# Altium PCB Power.PcbDoc
Units mil, origin at the board's own origin, x right, y up, seen from the top; angles counter-clockwise.
Board outline 1220.47 x 1511.81 mil, 2 copper layers (Top Layer, Bottom Layer), stack 21 mil thick; 38 components, 34 nets, 171 pads, 196 vias.
Unrouted connection lines stored in the file: 38.
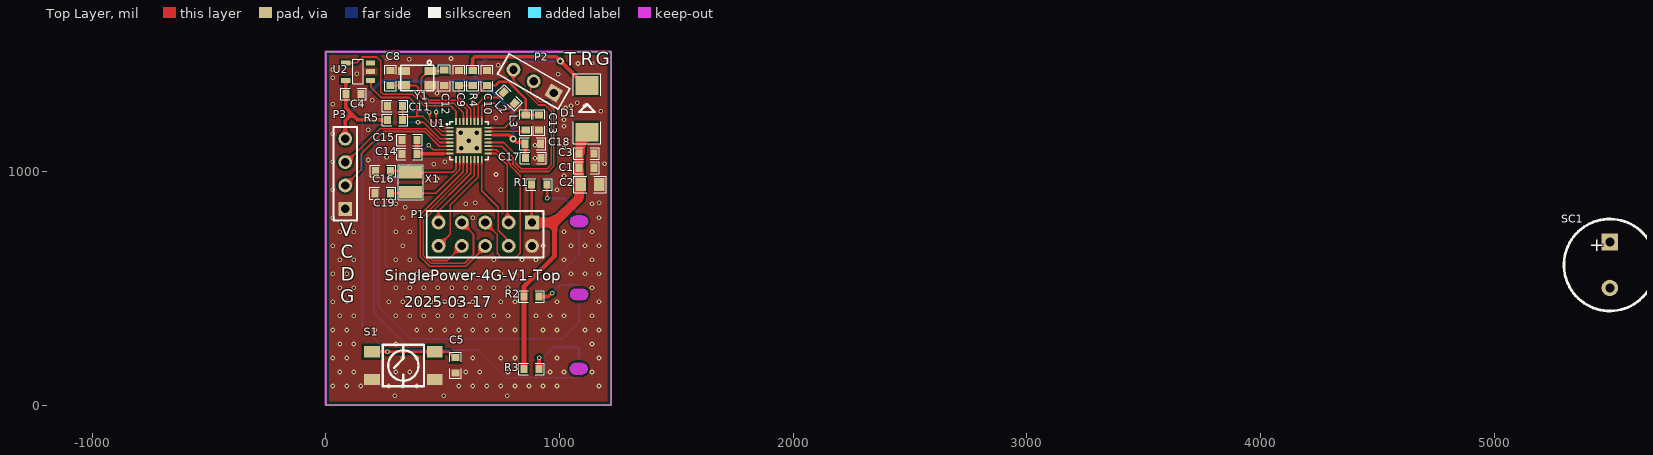
[diagram p0: Top Layer view]
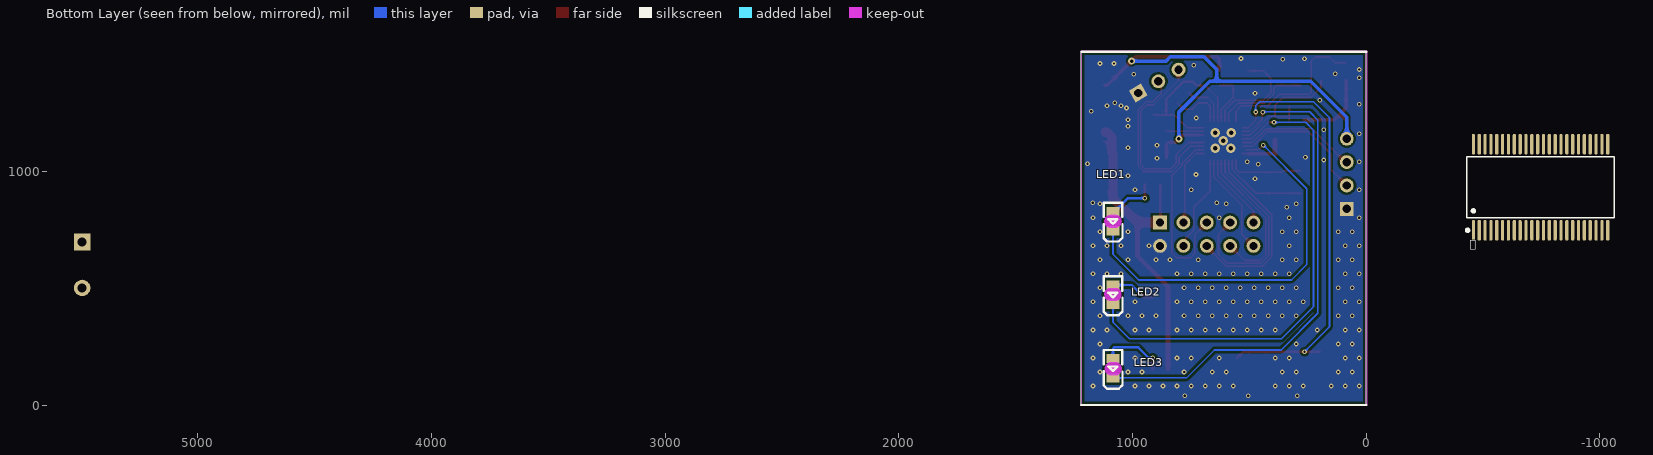
[diagram p1: Bottom Layer view, seen from below]

## Layer stack, top to bottom
Top Solder: solder mask 0.4, Solder Resist, Dk 3.5
Top Layer: signal copper 1.4
Dielectric 2: prepreg 2.8, Composite dielectric, Dk 4.1
Dielectric 1: prepreg 12.6, Composite dielectric, Dk 4.1
Dielectric 3: prepreg 2.8, Composite dielectric, Dk 4.1
Bottom Layer: signal copper 1.4
Bottom Solder: solder mask 0.4, Solder Resist, Dk 3.5

## Board outline
0,0 0,1511.81 1220.47,1511.81 1220.47,0
cut-out: 1070.22,130.42 cw(c1070.22,155.44) 1070.22,180.45 1093.85,180.45 cw(c1093.85,155.44) 1118.87,155.44 cw(c1093.85,155.44) 1093.85,130.42
cut-out: 1072.09,448.6 cw(c1072.09,473.62) 1072.09,498.63 1095.72,498.63 cw(c1095.72,473.62) 1120.74,473.62 cw(c1095.72,473.62) 1095.72,448.6
cut-out: 1071.88,761.52 cw(c1071.88,786.53) 1071.88,811.55 1095.52,811.55 cw(c1095.52,786.53) 1120.53,786.53 cw(c1095.52,786.53) 1095.52,761.52

## Design rules (kind name [scope] priority, off if disabled: settings)
Clearance "Via to pad" [IsVia vs IsPad] p1: gap=10 ignorepadtopadclearanceinfootprint=FALSE
Clearance Ploy [InPoly] p2: gap=10 ignorepadtopadclearanceinfootprint=FALSE
Clearance "Track to pad" [IsTrack vs IsPad] p3: gap=8 ignorepadtopadclearanceinfootprint=FALSE
Clearance "Track to track" [IsTrack vs IsTrack] p4: gap=5 ignorepadtopadclearanceinfootprint=FALSE
Clearance "Via to Track" [IsVia vs IsTrack] p5: gap=10 ignorepadtopadclearanceinfootprint=FALSE
Clearance "Via To Via" [IsVia vs IsVia] p6: gap=10 ignorepadtopadclearanceinfootprint=FALSE
ComponentClearance [All] p1: gap=0 collisioncheckmode=3 verticalgap=0 showdistances=FALSE
DiffPairsRouting [All] p1: maxlimit=10 minlimit=7 mostfreqgap=7 toplayer_minwidth=5 toplayer_maxwidth=100 toplayer_prefwidth=7 bottomlayer_minwidth=5 bottomlayer_maxwidth=100 bottomlayer_prefwidth=7 maxuncoupledlength=500
HoleSize [All] p1: absolutevalues=TRUE maxlimit=200 minlimit=1 maxpercent=80.000 minpercent=20.000
HoleToHoleClearance [All] p1: gap=5 allowstackedmicrovias=TRUE
MinimumSolderMaskSliver [All] p1: minsoldermaskwidth=0
PolygonConnect [All vs (InPadClass('All Pads'))] p1: connectstyle=Direct reliefconductorwidth=10 reliefentries=4 polygonreliefangle="90 Angle" airgapwidth=10
PolygonConnect GND焊盘 [InNet('GND_1') vs (InPadClass('All Pads'))] p2: connectstyle=Relief reliefconductorwidth=10 reliefentries=4 polygonreliefangle="90 Angle" airgapwidth=10
PolygonConnect GND过孔 [All vs IsVia] p3: connectstyle=Direct reliefconductorwidth=10 reliefentries=4 polygonreliefangle="90 Angle" airgapwidth=10
RoutingVias RoutingVias_1 [InNet('AGND_1')] p1: holewidth=10 width=20 viastyle="Through Hole" minholewidth=10 minwidth=20 maxholewidth=28 maxwidth=50
RoutingVias [All] p2: holewidth=10 width=20 viastyle="Through Hole" minholewidth=10 minwidth=20 maxholewidth=28 maxwidth=50
SilkToSilkClearance [All] p1: silktosilkclearance=0
SilkToSolderMaskClearance [IsPad] p1: minsilkscreentomaskgap=0 clearancetoexposedcopper=TRUE
SolderMaskExpansion [All] p1: expansion=1 istentingtop=FALSE
Width [All] p1: maxlimit=300 minlimit=5 preferedwidth=7 minimp=50.000000 maximp=50.000000 favimp=50.000000
23 further rules are at their usual default settings.

## Classes and differential pairs
component class MCU: C4 C5 C8 C9 C10 C11 C12 C13 C14 C15 C16 C17 C18 C19 L2 L3 LED1 LED2 LED3 P2 P3 R1 R2 R3 R4 R5 S1 U1 U2 X1 Y1
component class 连接: C1 C2 C3 D1 P1

## Components (designator, comment, footprint, x,y, rotation, side; value= is the part's Value field where it differs from the comment)
 "HT1621_C512789" SSOP48 -746.5,932.19 r180 bottom (schematic designator U7)
C1 "10uF/25V" 0603R 1148.31,1015.51 r180 top
C2 "47uF/10V" 0805R 1090.81,944 r0 top
C3 "104/10V" 0603R 1148.31,1076.6 r180 top
C4 "104" 0603R 150.99,1331.2 r180 top
C5 "104" 0603R 554.4,202.62 r270 top
C8 "12pF" 0603r 277.11,1432.82 r270 top
C9 "1uF/10V" 0603R 569.33,1432.82 r270 top
C10 "1uF/10V" 0603R 689.97,1432.82 r270 top
C11 "1uF/10V" 0603R 263.93,1280.48 r0 top
C12 "12pF" 0603r 506.95,1368.03 r90 top
C13 "1uF/10V" 0603R 912.97,1176.82 r90 top
C14 "2.2uF/10V" 0603R 324.96,1073.99 r0 top
C15 "104/10V" 0603R 324.96,1135.01 r0 top
C16 "10pF" 0603r 277.45,1002.12 r180 top
C17 "104/10V" 0603R 919.9,1057.45 r180 top
C18 "10uF/10V" 0603R 918.34,1118.1 r180 top
C19 "10pF" 0603r 211.11,906.72 r0 top
D1 "SS34" DO-214AC 1117.81,1368.03 r90 top
L2 "1.3nH" 0603R 761.57,1338.34 r315 top
L3 "4.7uH" 0603R 855.85,1176.44 r90 top
LED1 "LED" LED0805 1083.7,787.4 r90 bottom
LED2 "LED" LED0805 1083.7,472.44 r90 bottom
LED3 "LED" LED0805 1083.7,157.48 r90 bottom
P1 "Header 5X2" HDR2X5 882.2,781.18 r180 top locked
P2 "Header 3" HDR1X3 976,1335.62 r150 top
P3 "Header 4" HDR1X4 82.95,839.74 r90 top
R1 "Res2" 0603R 880.85,944 r0 top value=1K
R2 "Res2" 0603R 847.97,464.57 r0 top value=1K
R3 "Res2" 0603R 847.97,154.88 r0 top value=1K
R4 "0R/5%" 0603R 628.95,1432.82 r270 top
R5 "10K/5%" 0603R 263.93,1220.31 r0 top
S1 "SW2" 4.5*4.5贴片4脚独立按键 331.59,169.16 r180 top
SC1 "10F/2.7V" "5F 2.7V  10*20 脚尖距5mm" 5495.77,599.58 r270 top
U1 "N32WB031KEQ6-2" "QFN32 4X4" 612.29,1131.88 r0 top
U2 "CAT823ZTDI-GT3" SOT-23-5 191.07,1389.76 r90 top
X1 "32.768K/7pF" Y3215 362.96,953.48 r90 top
Y1 "32MHZ/8PF" 3225 391.52,1399.74 r0 top

## Footprints (in the part's own frame and the unit in brackets; to place one, negate y for a bottom-side part, rotate by r counter-clockwise, add the part's x,y. Pads: shape width x height; smd on the part's side, far side on the other; paste and mask are expansions set on the pad)
4.5*4.5贴片4脚独立按键 [mm]
  rect 1.7x1.2 smd: 1(-3.4,-1.5) 1(3.4,-1.5) 2(-3.4,1.5) 2(3.4,1.5)
  silkscreen extent -2.25,-2.25 2.25,2.25
"5F 2.7V  10*20 脚尖距5mm" [mm]
  rect 1.8x1.8 hole 1: 1(-2.5,0)
  round 1.8 hole 1: 2(2.5,0)
  silkscreen extent -5,-5 5,5
0603R [mil]
  rect 30x35 smd: 1(0,0) 2(65,0)
  silkscreen extent -23,-25 88,25
0603r [mil]
  rect 30x35 smd: 1(0,0) 2(65,0)
  silkscreen extent -23,-25 88,25
0805R [mil]
  rect 45x55 smd: 1(0,0) 2(80,0)
  silkscreen extent -30,-35 110,35
3225 [mm]
  rect 1.3x0.9 smd: 1(1.425,0.775) 2(-1.425,0.775) 3(-1.425,-0.775) 4(1.425,-0.775)
  silkscreen extent -1.78,-1.4 1.78,1.91, body extent -1.65,-1.3 1.55,1.2, height 0.61
DO-214AC [mil]
  rect 80x98.43 smd: 1(0,0) 2(-200,0)
  silkscreen extent -250,-59 50,59
HDR1X3 [mm] "Connector; Header; 3 Position"
  rect 1.5x1.5 hole 0.9: 1(0,0)
  round 1.5 hole 0.9: 2(2.54,0) 3(5.08,0)
  silkscreen extent -1.27,-1.27 6.35,1.27
HDR1X4 [mm] "Connector; Header; 4 Position"
  rect 1.5x1.5 hole 0.9: 1(0,0)
  round 1.5 hole 0.9: 2(2.54,0) 3(5.08,0) 4(7.62,0)
  silkscreen extent -1.27,-1.27 8.89,1.27
HDR2X5 [mm] "Connector; Header; 5x2 Position"
  rect 1.5x1.5 hole 0.9: 1(0,0)
  round 1.5 hole 0.9: 2(0,2.54) 3(2.54,0) 4(2.54,2.54) 5(5.08,0) 6(5.08,2.54) 7(7.62,0) 8(7.62,2.54) 9(10.16,0) 10(10.16,2.54)
  silkscreen extent -1.27,-1.27 11.43,3.81
LED0805 [mm]
  rect 1x1.4 smd: 1(1.05,0) 2(-1.05,0)
  silkscreen extent -2.22,-1.04 1.99,1.01
"QFN32 4X4" [mm]
  rect 0.76x0.2 smd paste-100 mask+0.051: 1(-2.08,1.4) 2(-2.08,1) 3(-2.08,0.6) 4(-2.08,0.2) 5(-2.08,-0.2) 6(-2.08,-0.6) 7(-2.08,-1) 8(-2.08,-1.4) 17(2.08,-1.4) 18(2.08,-1) 19(2.08,-0.6) 20(2.08,-0.2) 21(2.08,0.2) 22(2.08,0.6) 23(2.08,1) 24(2.08,1.4)
  rect 0.2x0.76 smd paste-100 mask+0.051: 9(-1.4,-2.08) 10(-1,-2.08) 11(-0.6,-2.08) 12(-0.2,-2.08) 13(0.2,-2.08) 14(0.6,-2.08) 15(1,-2.08) 16(1.4,-2.08) 25(1.4,2.08) 26(1,2.08) 27(0.6,2.08) 28(0.2,2.08) 29(-0.2,2.08) 30(-0.6,2.08) 31(-1,2.08) 32(-1.4,2.08)
  rect 2.7x2.7 smd paste-100 mask+0.051: 33(0,0)
  silkscreen extent -2.46,-2.08 2.08,2.08
SOT-23-5 [mm]
  rect 0.55x1 smd: 1(0,0) 2(0.95,0) 3(1.9,0) 4(1.9,2.7) 5(0,2.7)
  silkscreen extent -0.37,0.76 2.29,1.91
SSOP48 [mil]
  oval 14x89.24 smd: 1(-287.5,-184.19) 2(-262.5,-184.19) 3(-237.5,-184.19) 4(-212.5,-184.19) 5(-187.5,-184.19) 6(-162.5,-184.19) 7(-137.5,-184.19) 8(-112.5,-184.19) 9(-87.5,-184.19) 10(-62.5,-184.19) 11(-37.5,-184.19) 12(-12.5,-184.19) 13(12.5,-184.19) 14(37.5,-184.19) 15(62.5,-184.19) 16(87.5,-184.19) 17(112.5,-184.19) 18(137.5,-184.19) 19(162.5,-184.19) 20(187.5,-184.19) 21(212.5,-184.19) 22(237.5,-184.19) 23(262.5,-184.19) 24(287.5,-184.19) 25(287.5,184.19) 26(262.5,184.19) 27(237.5,184.19) 28(212.5,184.19) 29(187.5,184.19) 30(162.5,184.19) 31(137.5,184.19) 32(112.5,184.19) 33(87.5,184.19) 34(62.5,184.19) 35(37.5,184.19) 36(12.5,184.19) 37(-12.5,184.19) 38(-37.5,184.19) 39(-62.5,184.19) 40(-87.5,184.19) 41(-112.5,184.19) 42(-137.5,184.19) 43(-162.5,184.19) 44(-187.5,184.19) 45(-212.5,184.19) 46(-237.5,184.19) 47(-262.5,184.19) 48(-287.5,184.19)
  silkscreen extent -318,-190 316,131
Y3215 [mm]
  rect 1.35x2.5 smd: 1(-1.075,0) 2(1.075,0)
  silkscreen extent -1.9,-1.35 1.9,1.37

## Part data
: JLCPCB Part Class="Extended Part", LCSC Part Name=HT1621, Manufacturer=HGSEMI(华冠), Add into BOM=yes, Convert to PCB=yes, Datasheet=https://atta.szlcsc.com/upload/public/pdf/source/20210713/C512789_EAEA0A466E7F817181A87DC85DF4172E.pdf, Device=HT1621_C512789, Manufacturer Part=HT1621, Name=HT1621, Supplier=LCSC, Supplier Footprint=SSOP-48-300mil, Supplier Part=C512789, Symbol=HT1621
C1 C4 C5 C8 C12 C16 C19: library part CAP
C2: library part "Cap Pol1", "Polarized Capacitor (Radial)", LatestRevisionDate=17-Jul-2002, LatestRevisionNote="Re-released for DXP Platform.", PackageDescription="Polarized Capacitor (Radial); 2 Leads", PackageReference=RB7.6-15, Published=8-Jun-2000, Publisher="Altium Limited"
C3 C9 C10 C11 C13 C14 C15 C17 C18: library part CAP_1
D1: library part DIODE
L2 L3: library part Inductor, "Inductor", Code_IEC=1005, Code_JEITA=0402, LatestRevisionDate=29-May-2009, LatestRevisionNote="IPC-7351 Footprint Added.", PackageDescription="Chip Inductor", PackageReference=0402-A, Published=8-Jun-2000, Publisher="Altium Limited"
P1: "Header, 5-Pin, Dual row", LatestRevisionDate=17-Jul-2002, LatestRevisionNote="Re-released for DXP Platform.", Publisher="Altium Limited"
P2: "Header, 3-Pin", LatestRevisionDate=17-Jul-2002, LatestRevisionNote="Re-released for DXP Platform.", Publisher="Altium Limited"
P3: "Header, 4-Pin", LatestRevisionDate=17-Jul-2002, LatestRevisionNote="Re-released for DXP Platform.", Publisher="Altium Limited"
R4 R5: library part RES
SC1: library part CAP+
U1: JLCPCB Part Class="Extended Part", Manufacturer=Nations(国民技术), Add into BOM=yes, Convert to PCB=yes, Device=N32WB031KEQ6-2, LCSC Part Name=N32WB031KEQ6-2, Manufacturer Part=N32WB031KEQ6-2, Supplier=LCSC, Supplier Footprint=QFN-32, Supplier Part=C2981446, Symbol=N32WB031KEQ6-2
U2: library part CAT823
X1: library part XTAL
Y1: library part 12MHz无源
R1 R2 R3: LatestRevisionDate=17-Jul-2002, LatestRevisionNote="Re-released for DXP Platform.", PackageDescription="Axial Device, Thru-Hole; 2 Leads; 0.4 in Pin Spacing", PackageReference=AXIAL-0.4, Published=8-Jun-2000, Publisher="Altium Limited"

## Via types
v1: diameter 20, hole 10, Top Layer to Bottom Layer, 189 vias
v2: diameter 40, hole 20, Top Layer to Bottom Layer, 5 vias
v3: diameter 30, hole 15, Top Layer to Bottom Layer, 2 vias

## Nets (pads, with @x,y where several pads share a name; then routed paths per layer and width w, separated by ;. In a path a pad name is that pad's centre, name@x,y a point inside that pad or via, vN(x,y) a via of type N, cw(c..) or ccw(c..) an arc to the next point about the centre after c; other vN are vias at no path point)
4G_MCU_RXD: P1.4 U1.16 | length 416.4
  Top Layer w7: U1.16 667.41,917.05 737.72,846.75 737.72,748.32 772.24,713.79 772.24,691.14 P1.4
4G_MCU_TXD: P1.3 U1.17 | length 352.1
  Top Layer w7: U1.17 728.49,1076.76 776.83,1028.42 776.83,919.51 777.17,919.17 777.17,786.22 P1.3
4G_Reset: P1.5 U1.18 | length 787.7
  Top Layer w7: P1.5 733,730.39 733,649.43 751.25,631.18 812.83,631.18 832.4,650.75 832.4,981.51 788.83,1025.08 788.83,1033.39 729.71,1092.51 U1.18
BL0942_Control: P1.8 U1.13 | length 674.3
  Top Layer w7: P1.8 519.69,618.66 455.05,618.66 429,644.72 429,800.42 620.16,991.58 U1.13
BL0942_RXD: P1.9 U1.14 | length 332.5
  Top Layer w7: P1.9 482.2,829.78 635.91,983.49 U1.14
BL0942_TXD: P1.10 U1.15 | length 439
  Top Layer w7: P1.10 531.95,730.92 531.95,856.49 651.66,976.21 U1.15
Dog_WDI: U1.32 U2.4 | length 701.6
  Top Layer w7: U2.4 131.98,1464.56 157.12,1489.71 218.29,1489.71 235.54,1472.46 235.54,1338.29 244.27,1329.55 372.42,1329.55 421.04,1280.93 534.15,1280.93 557.17,1257.91 U1.32
GND: .7 .8 .18 .31 C1.1 C2.2 C3.1 C4.1 C5.2 C8.1 C9.1 C10.1 C11.1 C12.1 C13.1 C14.1 C15.1 C16.2 C17.1 C18.1 C19.1 P1.2 P2.1 P3.1 S1.2 U1.33 U2.2 Y1.2 Y1.4
  other v1: 295,40 505,40 776.83,40 29.27,81.56 89.27,81.56 149.27,81.56 269.27,81.56 329.27,81.56 389.27,81.56 569.27,81.56 629.27,81.56 689.27,81.56 749.27,81.56 809.27,81.56 869.27,81.56 929.27,81.56 989.27,81.56 1169.27,81.56 59.27,141.56 119.27,141.56 299.27,141.56 359.27,141.56 599.27,141.56 659.27,141.56 779.27,141.56 959.27,141.56 1019.27,141.56 1139.27,141.56 29.27,201.56 89.27,201.56 329.27,201.56 389.27,201.56 629.27,201.56 749.27,201.56 809.27,201.56 989.27,201.56 1169.27,201.56 59.27,261.56 119.27,261.56 299.27,261.56 1139.27,261.56 29.27,321.56 89.27,321.56 209.27,321.56 389.27,321.56 449.27,321.56 509.27,321.56 569.27,321.56 629.27,321.56 689.27,321.56 749.27,321.56 809.27,321.56 929.27,321.56 989.27,321.56 1109.27,321.56 1169.27,321.56 59.27,381.56 119.27,381.56 299.27,381.56 359.27,381.56 419.27,381.56 479.27,381.56 539.27,381.56 599.27,381.56 659.27,381.56 719.27,381.56 779.27,381.56 899.27,381.56 959.27,381.56 1019.27,381.56 1139.27,381.56 29.27,441.56 89.27,441.56 269.27,441.56 329.27,441.56 389.27,441.56 449.27,441.56 509.27,441.56 569.27,441.56 629.27,441.56 689.27,441.56 749.27,441.56 809.27,441.56 989.27,441.56 1169.27,441.56 59.27,501.56 119.27,501.56 299.27,501.56 359.27,501.56 419.27,501.56 479.27,501.56 539.27,501.56 599.27,501.56 659.27,501.56 719.27,501.56 779.27,501.56 1139.27,501.56 29.27,561.56 89.27,561.56 329.27,561.56 389.27,561.56 449.27,561.56 509.27,561.56 569.27,561.56 629.27,561.56 689.27,561.56 749.27,561.56 809.27,561.56 1049.27,561.56 1109.27,561.56 1169.27,561.56 59.27,621.56 119.27,621.56 299.27,621.56 359.27,621.56 719.27,621.56 839.27,621.56 899.27,621.56 1019.27,621.56 1139.27,621.56 29.27,681.56 89.27,681.56 329.27,681.56 929.27,681.56 1049.27,681.56 1109.27,681.56 1169.27,681.56 59.27,741.56 119.27,741.56 299.27,741.56 359.27,741.56 1019.27,741.56 1139.27,741.56 29.27,801.56 329.27,801.56 629.27,801.56 1169.27,801.56 340.43,846.75 299.27,861.56 599.27,861.56 1139.27,861.56 639.86,865.85 1170.81,865.85 29.27,921.56 749.27,921.56 989.27,921.56 475.59,969 1019.27,981.56 727.98,986.82 461.52,1030.05 1193,1033.39 29.27,1041.56 509.27,1041.56 180.86,1048.99 895.47,1055.88 259.95,1060.21 1019.27,1101.56 895.47,1112.19 29.27,1161.56 180.86,1178.55 1018.97,1193.94 1019.27,1221.56 726.72,1228.72 1176.87,1257.91 1025.72,1271.47 1049.27,1281.56 1109.27,1281.56 29.27,1287.07 1075.84,1294.14 199.02,1304.98 475.59,1334.62 29.27,1401.56 994.45,1415.32 131.98,1418.03 29.03,1436.44 737.72,1454.74 1079.27,1461.56 1139.27,1461.56 356.73,1479.76 263.93,1481.99 535.91,1483.56
  other v2: 645.73,1098.86 579.37,1099.41 612.29,1131.88 577.96,1165.38 645.89,1165.3
Key_button: .25 .26 .27 .28 .29 .30 C5.1 S1.1 U1.1 | length 1898.2
  Top Layer w7: v1(473.2,1254.33) 471.97,1253.1 471.97,1219.77 504.75,1187 U1.1
  Top Layer w10: S1.1@197.73,228.21 465.45,228.21 526.31,228.21 551.9,202.62 C5.1
  Bottom Layer w7: v1(263.93,228.21) 157.12,335.02 157.12,1229.82 225.48,1298.18 455.72,1298.18 473.2,1280.7 v1(473.2,1254.33)
LED_Gate: .24 LED1.2 U1.7 | length 1675.1
  Top Layer w7: v1(439.75,1112.19) 459.12,1092.82 515.13,1092.82 U1.7@515.44,1092.51
  Bottom Layer w7: v1(439.75,1112.19) 253.79,926.23 253.79,601.21 319.79,535.21 973.08,535.21 1083.7,645.83 LED1.2
LED_NET: LED2.2 U1.4 | length 2124.7
  Top Layer w7: v1(394.74,1209.88) 418.21,1209.88 488.34,1139.75 U1.4
  Bottom Layer w7: v1(394.74,1209.88) 258.74,1209.88 225.48,1176.61 225.48,420.52 362.44,283.56 1012.56,283.56 1083.7,354.7 LED2.2
LED_RUN: LED3.2 U1.2 | length 2209.2
  Top Layer w7: v1(443.22,1253.08) 445.11,1251.19 445.11,1223.05 496.91,1171.25 U1.2
  Bottom Layer w7: v1(443.22,1253.08) 440.99,1255.32 241.43,1255.32 206.56,1220.45 206.56,392.44 363.07,235.93 649.18,235.93 768.98,116.13 LED3.2
LPUART_RXD: P2.3 U1.20 | length 836.1
  Top Layer w7: U1.20 761.56,1124.01 812.83,1072.73 812.83,1035.02 835.97,1011.88 946.98,1011.88 964,1028.9 964,1259.62 939.15,1284.46 909.76,1284.46 802.79,1391.43 P2.3
LPUART_TXD: .47 .48 P2.2 U1.19 | length 780.2
  Top Layer w7: U1.19 752.79,1108.26 800.83,1060.21 800.83,1030.05 831,999.88 952.72,999.88 976,1023.15 976,1264.59 942.4,1298.18 913.01,1298.18 876.57,1334.62 876.57,1358.71 889.39,1371.53 P2.2
MCU_RESET: C11.2 R5.2 U1.3 U2.1 | length 609.8
  Top Layer w7: U2.1 193.44,1387.39 193.44,1360.14 237.23,1316.36 356.73,1316.36 389.96,1283.12 389.96,1234.34 344.53,1234.34 ; C11.2 R5.2 328.93,1222.81 340.43,1234.31 344.5,1234.31 ; 389.96,1235.36 415.83,1235.36 495.69,1155.5 U1.3
NetC9_2: C9.2 R4.2 U1.28 | length 234.7
  Top Layer w7: U1.28 620.16,1266.59 569.33,1317.42 C9.2 R4.2
NetC10_2: C10.2 C13.2 L3.2 U1.24 U1.27 | length 690.9
  Top Layer w7: U1.27 635.91,1316.26 687.47,1367.82 C10.2 ; U1.24 765.93,1187 820.76,1241.82 855.85,1241.82 C13.2
  Top Layer w10: C10.2 726.72,1367.82 743.15,1384.25 781.46,1384.25 855.85,1309.86 L3.2@855.85,1241.82
NetC14_2: C14.2 C15.2 U1.8 | length 201.8
  Top Layer w7: 506.14,1075.95 506.95,1076.76 U1.8
  Top Layer w15: C14.2 391.34,1075.36 505.55,1075.36
  Top Layer w20: C14.2 C15.2
NetL2_1: L2.1 U1.26 | length 206.5
  Top Layer w7: U1.26 651.66,1290.63 677.3,1316.26 739.49,1316.26 L2.1
NetL2_2: L2.2 U1.25 | length 232.6
  Top Layer w7: U1.25 667.41,1279.18 680.95,1292.72 718.38,1292.72 744.51,1266.59 781.74,1266.59 L2.2
NetL3_1: L3.1 U1.23 | length 163.8
  Top Layer w7: U1.23 850.66,1171.25 L3.1
NetLED1_1: LED1.1 R1.2 | length 219.1
  Top Layer w10: R1.2 946.98,942.87 v1(946.98,885.62)
  Bottom Layer w10: v1(946.98,885.62) 1018.97,885.62 1075.84,828.75 LED1.1
NetLED2_1: LED2.1 R2.2 | length 191.1
  Top Layer w15: R2.2 952.51,464.57 967,479.05 v1(968.35,479.05)
  Bottom Layer w10: v1(968.35,479.05) 1003.09,513.79 LED2.1
NetLED3_1: LED3.1 R3.2 | length 282.4
  Top Layer w15: R3.2 v1(912.97,202.62)
  Bottom Layer w10: v1(912.97,202.62) 931.15,202.62 976.09,247.56 1077.85,247.56 1083.7,241.7 LED3.1
Relay_C_A: P1.7 U1.12 | length 890.2
  Top Layer w7: P1.7 631.99,731.39 631.99,644.23 594.42,606.66 450.08,606.66 416.44,640.31 416.44,807.45 604.42,995.43 U1.12
Relay_C_B: P1.6 U1.11 | length 823.9
  Top Layer w7: U1.11 588.67,999.04 404,814.37 404,635.78 445.11,594.66 599.4,594.66 682.2,677.47 P1.6
SWCLK: P3.3 U1.5 | length 531.3
  Top Layer w7: P3.3 88.61,1039.74 231.93,1183.06 428.05,1183.06 487.1,1124.01 U1.5
SWDIO: P3.2 U1.6 | length 608.4
  Top Layer w7: P3.2 151.72,1008.51 151.72,1075.29 247.49,1171.06 423.08,1171.06 485.88,1108.26 U1.6
VCC3.8: C1.2 C2.1 C3.2 D1.2 P1.1 R1.1 R2.1 R3.1 | length 1390.4
  Top Layer w10: R1.1 880.85,782.53 P1.1
  Top Layer w20: R3.1 R2.1 847.97,506.98 978.87,637.88 978.87,781.18
  Top Layer w40: P1.1 978.87,781.18 1083.31,885.62 C3.2 1088.6,1081.89 1088.6,1148.03 1108.6,1168.03 D1.2
VCC33: .40 .41 .42 .43 C4.2 C17.2 C18.2 D1.1 P3.4 R4.1 R5.1 U1.22 U2.5 | length 2752.1
  Top Layer w7: U1.22 718.38,1155.5
  Top Layer w13: U2.5 85.99,1388.54 C4.2 ; 718.38,1155.5 785.47,1155.5 v3(801.22,1139.74) 816.32,1124.65 846.8,1124.65 C18.2 854.12,1117.32 854.12,1058.23 C17.2
  Top Layer w15: P3.4 82.95,1217.27 111.57,1245.89 ; C4.2 85.99,1271.47 111.57,1245.89 ; R5.1 137.15,1220.31 111.57,1245.89 ; R4.1@628.24,1433.53 628.24,1481.99 637.03,1490.78 985.84,1490.78 v3(1004.16,1472.46) 1108.6,1368.03 D1.1
  Bottom Layer w15: P3.4 82.95,1231.27 237.3,1385.62 639.85,1385.62 ; v3(801.22,1139.74) 801.22,1254.07 669.67,1385.62 639.85,1385.62 ; v3(1004.16,1472.46) 856.3,1472.46 837.99,1490.78 694.19,1490.78 639.85,1436.44 639.85,1385.62
XIN_32K: C16.1 U1.9 X1.2 | length 328.3
  Top Layer w7: C16.1 356.64,1002.12 X1.2 543.15,995.8 557.17,1009.83 U1.9
XO32MP_IN: C8.2 U1.30 Y1.3 | length 415.3
  Top Layer w7: C8.2 Y1.3@335.42,1367.82 ; Y1.3 Y1.3@335.42,1367.82 ; U1.30 588.67,1252.14 547.88,1292.93 434.15,1292.93 395.95,1331.12 395.95,1358.5 386.63,1367.82 Y1.3@335.42,1367.82
XO32MP_OUT: C12.2 U1.29 Y1.1 | length 451.9
  Top Layer w7: C12.2 504.17,1430.25 Y1.1 439.75,1430.25 407.95,1398.46 407.95,1336.09 439.06,1304.98 562.88,1304.98 604.42,1263.44 U1.29
XOUT_32K: C19.2 U1.10 X1.1 | length 380.4
  Top Layer w7: C19.2 471.03,906.72 572.92,1008.61 U1.10
pads on no net: .1 .2 .3 .4 .5 .6 .9 .10 .11 .12 .13 .14 .15 .16 .17 .19 .20 .21 .22 .23 .32 .33 .34 .35 .36 .37 .38 .39 .44 .45 .46 SC1.1 SC1.2 U1.21 U1.31 U2.3

## Polygon pours and split planes (outlines as drawn)
GND on Top Layer "GND_L01_P000" (solid, remove dead copper, pour order 0): -137,1700 1559,1700 1559,25 1634,-50 1420,-264 -216,-264 -353,-127 -176,50 -176,1661
GND on Bottom Layer "GND_L02_P001" (solid, remove dead copper, pour order 1): 50,1643 1502,1643 1521,1624 1472,1575 1472,-125 -178,-125 -229,-176 -247,-158 -247,1353 45,1645

## Keep-outs
Keep-Out Layer:
  lines w10: 0,0 0,1511.81 570.87,1511.81 649.61,1511.81 1220.47,1511.81 1220.47,0 649.61,0 570.87,0 0,0
  lines w50: 1070.22,155.44 1093.85,155.44 ; 1071.88,786.53 1095.52,786.53 ; 1072.09,473.62 1095.72,473.62

## Silkscreen, mask and mechanical layers (free items; w line width, h text height)
Top Overlay:
  text "G" at 1155.75,1435.1 h100
  text "R" at 1091.11,1434.95 h100
  text "T" at 1021.57,1433.74 h100
  text "V" at 61.77,702.85 h100
  text "C" at 64.12,608.72 h100
  text "SinglePower-4G-V1-Top" at 251.11,515.78 h80
  text "D" at 62.97,512.82 h100
  text "G" at 62.18,419.11 h100
  text "2025-03-17" at 335.42,400.48 h80
Bottom Overlay:
  lines w10: 0,0 1220.47,0 ; 0,1511.81 1218,1511.81

## Text inside footprints (layer, text, board x,y; h text height)
SC1: Top Overlay "+" at 5397.77,716.58 h100 r270